# Altium PCB Q23_BRAKE_LIGHT_O1.PcbDoc
Units mm, origin at the board's own origin, x right, y up, seen from the top; angles counter-clockwise.
Board outline 130.85 x 50 mm, 2 copper layers (Top Layer, Bottom Layer); 73 components, 38 nets, 147 pads, 21 vias.
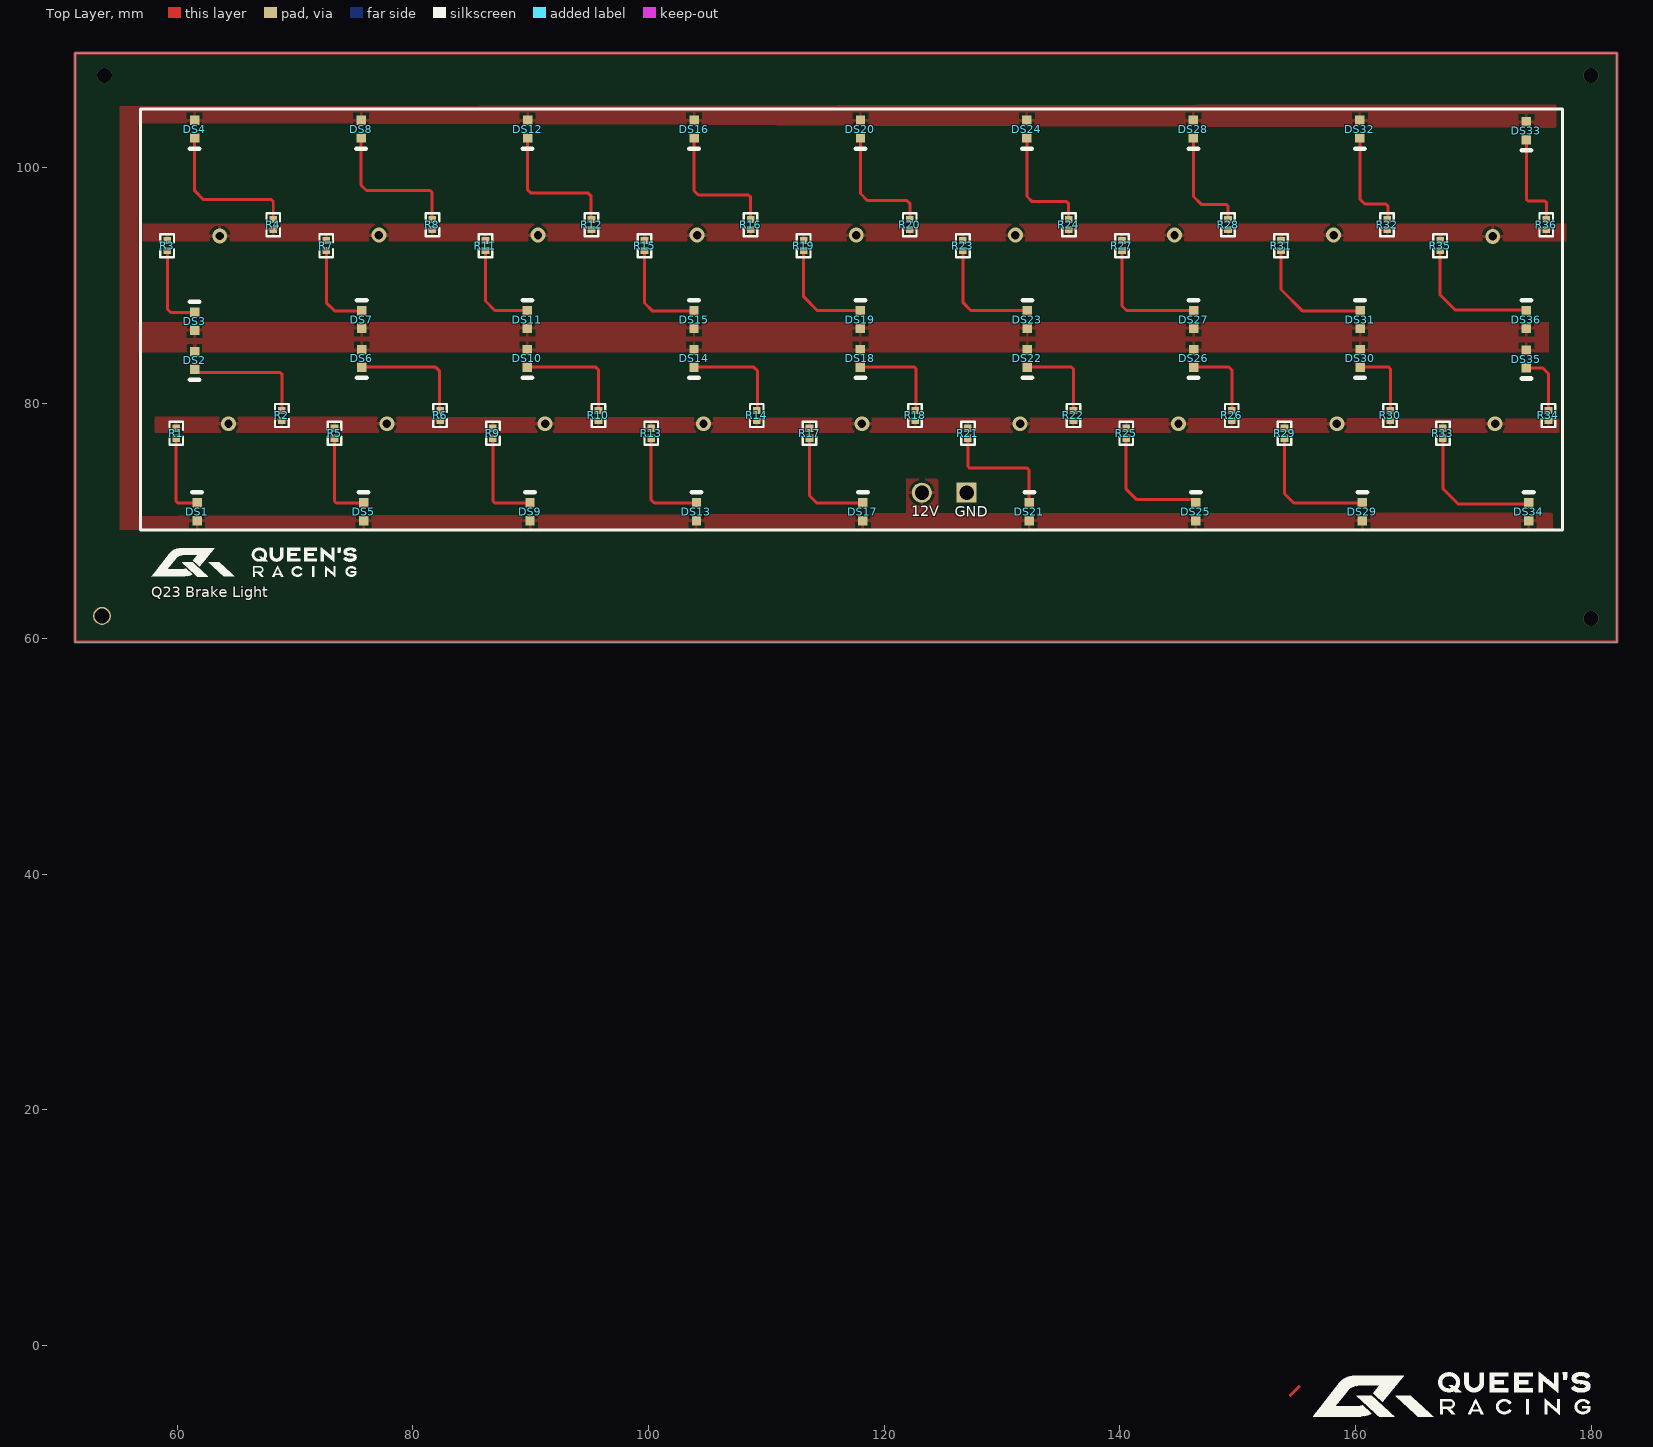
[diagram p0: Top Layer view]
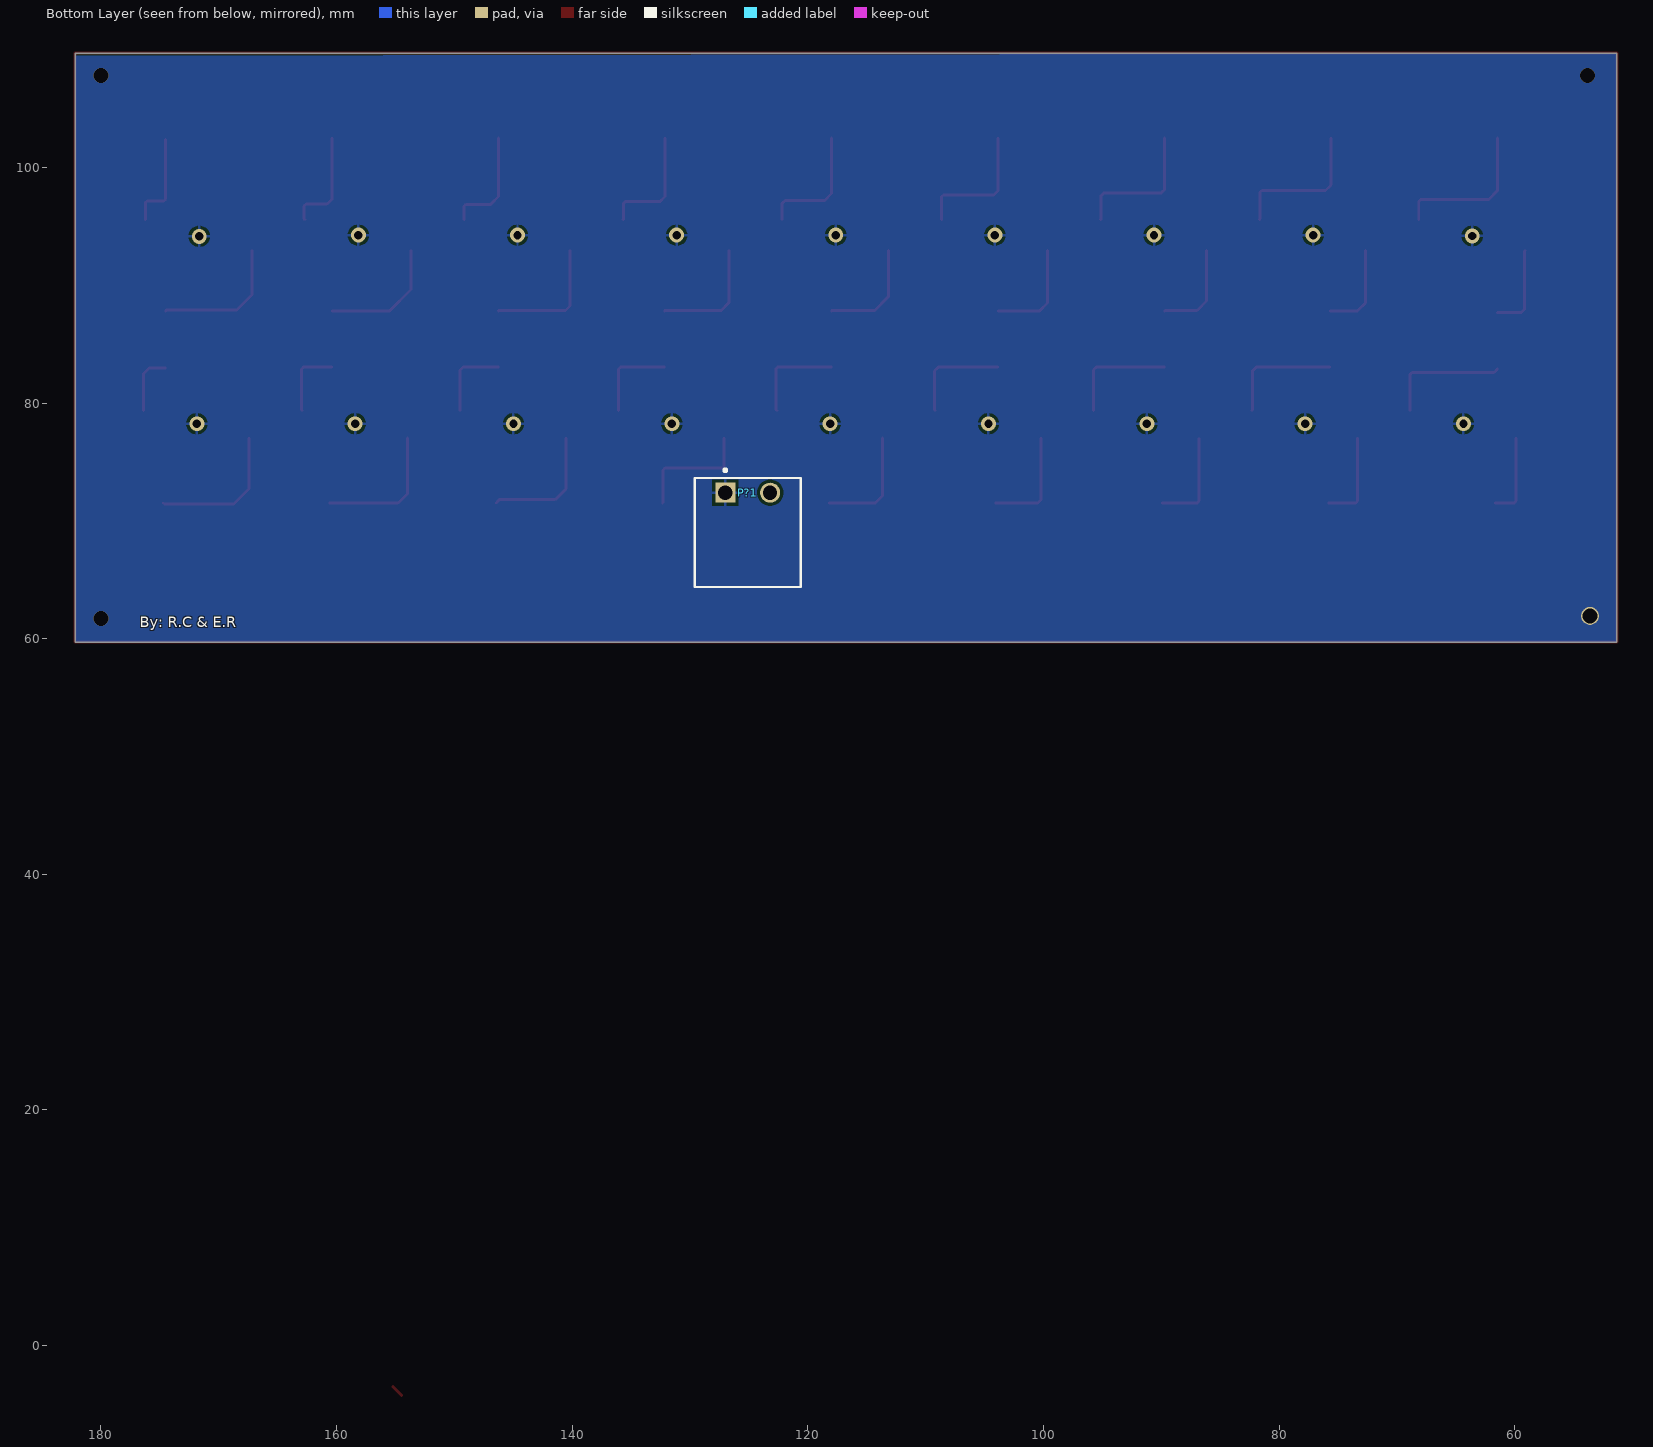
[diagram p1: Bottom Layer view, seen from below]
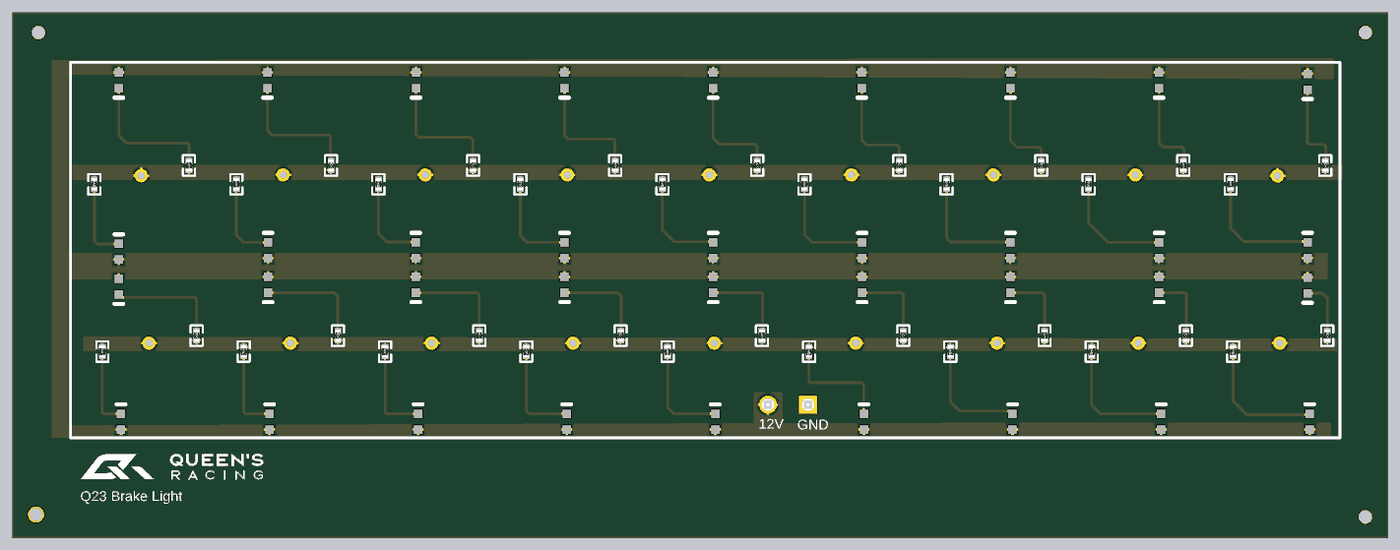
[diagram p2: 3D render of the assembled board from above, using the file's embedded part models]

## Layer stack, top to bottom
Top Solder: solder mask 0.0102, Solder Resist, Dk 3.5
Top Layer: signal copper 0.0356
Dielectric 1: dielectric 0.32, FR-4, Dk 4.8
Bottom Layer: signal copper 0.0356
Bottom Solder: solder mask 0.0102, Solder Resist, Dk 3.5

## Board outline
51.339,59.698 51.339,109.698 182.191,109.698 182.191,59.698

## Design rules (kind name [scope] priority, off if disabled: settings)
Clearance [All] p1: gap=0.254 ignorepadtopadclearanceinfootprint=FALSE except(0: Arc-Hole Track-Hole SMDPad-Hole THPad-Hole Via-Hole Fill-Hole Poly-Hole Region-Hole Text-Hole)
PolygonConnect [All] p1: connectstyle=Relief reliefconductorwidth=0.254 reliefentries=4 polygonreliefangle="90 Angle" airgapwidth=0.254
RoutingVias [All] p1: holewidth=0.711 width=1.27 viastyle="Through Hole" minholewidth=0.711 minwidth=1.27 maxholewidth=0.711 maxwidth=1.27
SolderMaskExpansion [All] p1: expansion=0.102 istentingtop=FALSE
Width [All] p1: maxlimit=0.254 minlimit=0.254 preferedwidth=0.254
30 further rules are at their usual default settings.

## Components (designator, comment, footprint, x,y, rotation, side; value= is the part's Value field where it differs from the comment)
DS1 "HSMW-C191" AVAG-HSMW-C191_V 61.693,70.771 r90 top (schematic designator DS9)
DS2 "HSMW-C191" AVAG-HSMW-C191_V 61.485,83.618 r270 top (schematic designator DS20)
DS3 "HSMW-C191" AVAG-HSMW-C191_V 61.485,86.945 r90 top (schematic designator DS17)
DS4 "HSMW-C191" AVAG-HSMW-C191_V 61.485,103.242 r270 top (schematic designator DS8)
DS5 "HSMW-C191" AVAG-HSMW-C191_V 75.82,70.771 r90 top (schematic designator DS14)
DS6 "HSMW-C191" AVAG-HSMW-C191_V 75.669,83.789 r270 top (schematic designator DS15)
DS7 "HSMW-C191" AVAG-HSMW-C191_V 75.669,87.081 r90 top (schematic designator DS4)
DS8 "HSMW-C191" AVAG-HSMW-C191_V 75.613,103.242 r270 top (schematic designator DS16)
DS9 "HSMW-C191" AVAG-HSMW-C191_V 89.948,70.771 r90 top (schematic designator DS30)
DS10 "HSMW-C191" AVAG-HSMW-C191_V 89.723,83.789 r270 top (schematic designator DS25)
DS11 "HSMW-C191" AVAG-HSMW-C191_V 89.723,87.081 r90 top (schematic designator DS18)
DS12 "HSMW-C191" AVAG-HSMW-C191_V 89.741,103.242 r270 top (schematic designator DS28)
DS13 "HSMW-C191" AVAG-HSMW-C191_V 104.076,70.771 r90 top (schematic designator DS11)
DS14 "HSMW-C191" AVAG-HSMW-C191_V 103.865,83.789 r270 top (schematic designator DS10)
DS15 "HSMW-C191" AVAG-HSMW-C191_V 103.865,87.081 r90 top (schematic designator DS6)
DS16 "HSMW-C191" AVAG-HSMW-C191_V 103.868,103.242 r270 top (schematic designator DS13)
DS17 "HSMW-C191" AVAG-HSMW-C191_V 118.203,70.771 r90 top (schematic designator DS26)
DS18 "HSMW-C191" AVAG-HSMW-C191_V 117.992,83.789 r270 top (schematic designator DS31)
DS19 "HSMW-C191" AVAG-HSMW-C191_V 117.992,87.081 r90 top (schematic designator DS5)
DS20 "HSMW-C191" AVAG-HSMW-C191_V 117.996,103.242 r270 top (schematic designator DS19)
DS21 "HSMW-C191" AVAG-HSMW-C191_V 132.331,70.771 r90 top (schematic designator DS12)
DS22 "HSMW-C191" AVAG-HSMW-C191_V 132.155,83.789 r270 top (schematic designator DS23)
DS23 "HSMW-C191" AVAG-HSMW-C191_V 132.155,87.081 r90 top (schematic designator DS29)
DS24 "HSMW-C191" AVAG-HSMW-C191_V 132.123,103.242 r270 top (schematic designator DS27)
DS25 "HSMW-C191" AVAG-HSMW-C191_V 146.458,70.771 r90 top (schematic designator DS24)
DS26 "HSMW-C191" AVAG-HSMW-C191_V 146.263,83.789 r270 top (schematic designator DS3)
DS27 "HSMW-C191" AVAG-HSMW-C191_V 146.263,87.081 r90 top (schematic designator DS22)
DS28 "HSMW-C191" AVAG-HSMW-C191_V 146.251,103.242 r270 top (schematic designator DS7)
DS29 "HSMW-C191" AVAG-HSMW-C191_V 160.586,70.771 r90 top (schematic designator DS2)
DS30 "HSMW-C191" AVAG-HSMW-C191_V 160.393,83.789 r270 top (schematic designator DS21)
DS31 "HSMW-C191" AVAG-HSMW-C191_V 160.393,87.081 r90 top (schematic designator DS1)
DS32 "HSMW-C191" AVAG-HSMW-C191_V 160.379,103.242 r270 top
DS33 "HSMW-C191" AVAG-HSMW-C191_V 174.506,103.111 r270 top (schematic designator DS36)
DS34 "HSMW-C191" AVAG-HSMW-C191_V 174.714,70.771 r90 top (schematic designator DS33)
DS35 "HSMW-C191" AVAG-HSMW-C191_V 174.506,83.73 r270 top (schematic designator DS34)
DS36 "HSMW-C191" AVAG-HSMW-C191_V 174.506,87.081 r90 top (schematic designator DS35)
P?1 "1803277" PHOE-1803277_V 125.107,72.391 r180 bottom (schematic designator P?)
R1 "22Ω ±1%" 0402_R 59.923,77.437 r270 top (schematic designator R9)
R2 "22Ω ±1%" 0402_R 68.881,78.944 r90 top (schematic designator R20)
R3 "22Ω ±1%" 0402_R 59.152,93.358 r270 top (schematic designator R17)
R4 "22Ω ±1%" 0402_R 68.156,95.138 r90 top (schematic designator R8)
R5 "22Ω ±1%" 0402_R 73.36,77.437 r270 top (schematic designator R14)
R6 "22Ω ±1%" 0402_R 82.319,78.944 r90 top (schematic designator R15)
R7 "22Ω ±1%" 0402_R 72.658,93.358 r270 top (schematic designator R4)
R8 "22Ω ±1%" 0402_R 81.661,95.138 r90 top (schematic designator R16)
R9 "22Ω ±1%" 0402_R 86.798,77.437 r270 top (schematic designator R30)
R10 "22Ω ±1%" 0402_R 95.757,78.944 r90 top (schematic designator R25)
R11 "22Ω ±1%" 0402_R 86.163,93.358 r270 top (schematic designator R18)
R12 "22Ω ±1%" 0402_R 95.166,95.138 r90 top (schematic designator R28)
R13 "22Ω ±1%" 0402_R 100.236,77.437 r270 top (schematic designator R11)
R14 "22Ω ±1%" 0402_R 109.194,78.944 r90 top (schematic designator R10)
R15 "22Ω ±1%" 0402_R 99.668,93.358 r270 top (schematic designator R6)
R16 "22Ω ±1%" 0402_R 108.671,95.138 r90 top (schematic designator R13)
R17 "22Ω ±1%" 0402_R 113.674,77.437 r270 top (schematic designator R26)
R18 "22Ω ±1%" 0402_R 122.632,78.944 r90 top (schematic designator R31)
R19 "22Ω ±1%" 0402_R 113.173,93.358 r270 top (schematic designator R5)
R20 "22Ω ±1%" 0402_R 122.177,95.138 r90 top (schematic designator R19)
R21 "22Ω ±1%" 0402_R 127.111,77.437 r270 top (schematic designator R12)
R22 "22Ω ±1%" 0402_R 136.07,78.944 r90 top (schematic designator R23)
R23 "22Ω ±1%" 0402_R 126.678,93.358 r270 top (schematic designator R29)
R24 "22Ω ±1%" 0402_R 135.682,95.138 r90 top (schematic designator R27)
R25 "22Ω ±1%" 0402_R 140.549,77.437 r270 top (schematic designator R24)
R26 "22Ω ±1%" 0402_R 149.507,78.944 r90 top (schematic designator R3)
R27 "22Ω ±1%" 0402_R 140.184,93.358 r270 top (schematic designator R22)
R28 "22Ω ±1%" 0402_R 149.187,95.138 r90 top (schematic designator R7)
R29 "22Ω ±1%" 0402_R 153.987,77.437 r270 top (schematic designator R2)
R30 "22Ω ±1%" 0402_R 162.945,78.944 r90 top (schematic designator R21)
R31 "22Ω ±1%" 0402_R 153.689,93.358 r270 top (schematic designator R1)
R32 "22Ω ±1%" 0402_R 162.692,95.138 r90 top
R33 "22Ω ±1%" 0402_R 167.424,77.437 r270 top
R34 "22Ω ±1%" 0402_R 176.383,78.944 r90 top
R35 "22Ω ±1%" 0402_R 167.194,93.358 r270 top
R36 "22Ω ±1%" 0402_R 176.198,95.138 r90 top

## Footprints (in the part's own frame and the unit in brackets; to place one, negate y for a bottom-side part, rotate by r counter-clockwise, add the part's x,y. Pads: shape width x height; smd on the part's side, far side on the other; paste and mask are expansions set on the pad)
0402_R [mm]
  rect 0.6x0.65 smd mask+0.051: 1(-0.425,0) 2(0.425,0)
  silkscreen extent -0.97,-0.58 0.97,0.58, body extent -0.57,-0.27 0.58,0.28, height 0.41
AVAG-HSMW-C191_V [mm] "SMD, 2-Leads, Body 1.6x0.8mm"
  rect 0.8x0.8 smd: 1(-0.75,0) 2(0.75,0)
  silkscreen extent 1.65,-0.4 1.65,0.4, body extent -0.8,-0.4 0.8,0.4, height 0.7
PHOE-1803277_V [mm] "CONN, Body 9.2x9.01mm, Pitch 3.81mm"
  rect 1.7x1.7 hole 1.2: 1(-1.905,0)
  round 1.7 hole 1.2: 2(1.905,0)
  silkscreen extent -4.5,-8 4.5,2.02, body extent -4.51,-8 4.5,1.29, height 7.25

## Part data
DS1 DS2 DS3 DS4 DS5 DS6 DS7 DS8 DS9 DS10 DS11 DS12 DS13 DS14 DS15 DS16 DS17 DS18 DS19 DS20 DS21 DS22 DS23 DS24 DS25 DS26 DS27 DS28 DS29 DS30 DS31 DS32 DS33 DS34 DS35 DS36: library part CMP-007-00016-2, "LED Uni-Color White, 78 mW, 20 mA, -40 to 85 degC, 2-Pin SMD, RoHS, Tape and Reel", Case/Package=0603, Colour=White, Forward Current=20mA, Forward Voltage=3.6V, Manufacturer=Avago, Max Operating Temperature=85°C, Min Operating Temperature=-40°C, Package Description="2-Pin Surface Mount Device, Body 1.6 x 0.8 mm", Package Quantity=4000, Power=78mW, Datasheet URL=http://docs.avagotech.com/docs/AV02-0186EN, Datasheet Version=May-10, Illumination Colour=White, Lens Style=Diffused, Luminous Intensity=200mcd, Manufacturer URL=http://www.avagotech.com/, Mounting Technology=SM, Nominal Vf=3.6V, Package Reference=HSMW-C191, Packaging=TapeandReel, Pins=2, RoHS Compliant=True, Viewing Angle=140degrees
P?1: library part CMP-002-00014-2, "Male Header, Pitch 3.81 mm, 1 x 2 Position, Height 7.25 mm, Tail Length 3.4 mm, RoHS, Bulk", Colour=Green, Current Rating=8A, Manufacturer="Phoenix Contact", Package Description="Male Header, Pitch 3.81 mm, 1 x 2 Position, Height 7.25 mm, Tail Length 3.4 mm", Package Quantity=50, Voltage Rating=160V, Case/Package=1803277, Connector Type=Header, Contact Plating=Tin, Datasheet URL=https://datasheet.ciiva.com/16096/1803277-16096845.pdf, Datasheet Version=Feb-14, Diameter=7.25mm, Gender=Male, Lead Pitch=0.15inch, Manufacturer URL=http://www.phoenixcontact.com/, Max Current Rating=8A, Mounting Technology=TH, Package Reference=1803277, Packaging=Bulk, Pins=2, RoHS Compliant=True, Rows=1
R1 R2 R3 R4 R5 R6 R7 R8 R9 R10 R11 R12 R13 R14 R15 R16 R17 R18 R19 R20 R21 R22 R23 R24 R25 R26 R27 R28 R29 R30 R31 R32 R33 R34 R35 R36: library part "0402 22R (22R0) 1%", "Chip resistor", Manufacturer="Uniroyal Elec", Package=0402, PartNumber=0402WGF220JTCE, Power=1/16W, Resistance=22Ω, SuppliersPartNumber=C25092, Tolerance=1%, ComponentLink1Description="Supplier link", ComponentLink1URL=http://www.szlcsc.com/product/details_25835.html, Supplier=LC

## Free pads (board coordinates)
  round 1.524 hole 1.27: 3(53.618,61.931)

## Via types
v1: diameter 1.27, hole 0.711, Top Layer to Bottom Layer, 18 vias
v2: diameter 1.27, hole 1.27, Top Layer to Bottom Layer, 3 vias

## Nets (pads, with @x,y where several pads share a name; then routed paths per layer and width w, separated by ;. In a path a pad name is that pad's centre, name@x,y a point inside that pad or via, vN(x,y) a via of type N, cw(c..) or ccw(c..) an arc to the next point about the centre after c; other vN are vias at no path point)
+12: DS1.1 DS2.1 DS3.1 DS4.1 DS5.1 DS6.1 DS7.1 DS8.1 DS9.1 DS10.1 DS11.1 DS12.1 DS13.1 DS14.1 DS15.1 DS16.1 DS17.1 DS18.1 DS19.1 DS20.1 DS21.1 DS22.1 DS23.1 DS24.1 DS25.1 DS26.1 DS27.1 DS28.1 DS29.1 DS30.1 DS31.1 DS32.1 DS33.1 DS34.1 DS35.1 DS36.1 P?1.2
GND: P?1.1 R1.1 R2.1 R3.1 R4.1 R5.1 R6.1 R7.1 R8.1 R9.1 R10.1 R11.1 R12.1 R13.1 R14.1 R15.1 R16.1 R17.1 R18.1 R19.1 R20.1 R21.1 R22.1 R23.1 R24.1 R25.1 R26.1 R27.1 R28.1 R29.1 R30.1 R31.1 R32.1 R33.1 R34.1 R35.1 R36.1
  other v1: 64.362,78.243 77.8,78.243 91.237,78.243 104.675,78.243 118.113,78.243 131.551,78.243 144.988,78.243 158.426,78.243 171.864,78.243 171.656,94.144 63.614,94.178 77.119,94.246 90.624,94.246 104.13,94.246 117.635,94.246 131.14,94.246 144.645,94.246 158.151,94.246
NetDS1_2: DS31.2 R31.2 | length 10.8
  Top Layer w0.254: R31.2 153.689,89.632 155.49,87.831 DS31.2
NetDS2_2: DS29.2 R29.2 | length 11.6
  Top Layer w0.254: R29.2 153.987,72.307 154.773,71.521 DS29.2
NetDS3_2: DS26.2 R26.2 | length 6.8
  Top Layer w0.254: DS26.2 149.265,83.039 149.507,82.797 R26.2
NetDS4_2: DS7.2 R7.2 | length 7.7
  Top Layer w0.254: R7.2 72.658,88.516 73.348,87.826 75.664,87.826 DS7.2
NetDS5_2: DS19.2 R19.2 | length 9.2
  Top Layer w0.254: R19.2 113.173,89.014 114.313,87.874 117.949,87.874 DS19.2
NetDS6_2: DS15.2 R15.2 | length 8.9
  Top Layer w0.254: R15.2 99.668,88.482 100.319,87.831 DS15.2
NetDS7_2: DS28.2 R28.2 | length 9.4
  Top Layer w0.254: DS28.2 146.251,97.522 146.912,96.861 149.03,96.861 149.178,96.712 149.178,95.572 R28.2
NetDS8_2: DS4.2 R4.2 | length 13.1
  Top Layer w0.254: DS4.2 61.485,98.011 62.234,97.263 68.007,97.263 68.156,97.114 R4.2
NetDS9_2: DS1.2 R1.2 | length 7.2
  Top Layer w0.254: R1.2@59.898,77.012 59.898,71.67 60.046,71.521 DS1.2
NetDS10_2: DS14.2 R14.2 | length 8.9
  Top Layer w0.254: DS14.2 108.946,83.039 109.253,82.732 109.253,79.428 R14.2
NetDS11_2: DS13.2 R13.2 | length 9.2
  Top Layer w0.254: R13.2 100.236,71.777 100.492,71.521 DS13.2
NetDS12_2: DS21.2 R21.2 | length 10.5
  Top Layer w0.254: R21.2 127.111,74.619 127.26,74.471 132.144,74.471 132.293,74.322 132.293,71.559 DS21.2
NetDS13_2: DS16.2 R16.2 | length 11.4
  Top Layer w0.254: DS16.2 103.868,98.025 104.229,97.664 108.498,97.664 108.646,97.516 108.646,95.588 R16.2
NetDS14_2: DS5.2 R5.2 | length 7.9
  Top Layer w0.254: R5.2@73.36,77.011 73.36,71.67 73.508,71.521 DS5.2
NetDS15_2: DS6.2 R6.2 | length 10.1
  Top Layer w0.254: DS6.2 81.945,83.039 82.286,82.698 82.286,79.402 R6.2
NetDS16_2: DS8.2 R8.2 | length 12.6
  Top Layer w0.254: DS8.2 75.613,98.484 76.06,98.037 81.476,98.037 81.625,97.888 81.625,95.599 R8.2
NetDS17_2: DS3.2 R3.2 | length 7.4
  Top Layer w0.254: R3.2 59.178,92.907 59.178,87.959 59.468,87.669 61.459,87.669 DS3.2
NetDS18_2: DS11.2 R11.2 | length 8.2
  Top Layer w0.254: R11.2 86.163,88.662 86.963,87.862 89.692,87.862 DS11.2
NetDS19_2: DS20.2 R20.2 | length 10.6
  Top Layer w0.254: DS20.2 117.996,97.781 118.6,97.177 121.951,97.177 122.177,96.951 R20.2
NetDS20_2: DS2.2 R2.2 | length 10.7
  Top Layer w0.254: DS2.2 61.758,82.595 68.739,82.595 68.888,82.446 68.888,79.376 R2.2
NetDS21_2: DS30.2 R30.2 | length 6.2
  Top Layer w0.254: DS30.2 162.833,83.039 162.982,82.89 162.982,79.406 R30.2
NetDS22_2: DS27.2 R27.2 | length 10.9
  Top Layer w0.254: R27.2 140.184,88.242 140.576,87.85 146.244,87.85 DS27.2
NetDS23_2: DS22.2 R22.2 | length 7.5
  Top Layer w0.254: DS22.2 135.912,83.039 136.07,82.881 R22.2
NetDS24_2: DS25.2 R25.2 | length 10.7
  Top Layer w0.254: R25.2 140.549,72.691 141.446,71.794 146.185,71.794 DS25.2
NetDS25_2: DS10.2 R10.2 | length 9.6
  Top Layer w0.254: DS10.2 95.536,83.039 95.757,82.818 R10.2
NetDS26_2: DS17.2 R17.2 | length 9.7
  Top Layer w0.254: R17.2 113.674,72.12 114.278,71.516 116.102,71.516 116.107,71.521 DS17.2
NetDS27_2: DS24.2 R24.2 | length 10.1
  Top Layer w0.254: DS24.2 132.123,97.537 132.57,97.091 135.496,97.091 135.668,96.919 135.668,95.577 R24.2
NetDS28_2: DS12.2 R12.2 | length 12
  Top Layer w0.254: DS12.2 89.741,98.097 90.001,97.836 94.849,97.836 95.136,97.55 95.136,95.593 R12.2
NetDS29_2: DS23.2 R23.2 | length 10.2
  Top Layer w0.254: R23.2 126.678,88.544 127.384,87.838 132.148,87.838 DS23.2
NetDS30_2: DS9.2 R9.2 | length 8.6
  Top Layer w0.254: R9.2@86.8,77.01 86.8,71.67 86.948,71.521 DS9.2
NetDS31_2: DS18.2 R18.2 | length 8.3
  Top Layer w0.254: DS18.2 122.57,83.039 122.719,82.89 122.719,79.456 R18.2
NetDS32_2: DS32.2 R32.2 | length 9
  Top Layer w0.254: DS32.2 160.379,97.307 160.796,96.89 162.598,96.89 162.746,96.741 162.746,95.617 R32.2
NetDS33_2: DS34.2 R33.2 | length 12.2
  Top Layer w0.254: R33.2 167.424,72.722 168.726,71.421 174.614,71.421 DS34.2
NetDS34_2: DS35.2 R34.2 | length 5.2
  Top Layer w0.254: DS35.2 175.895,82.98 176.381,82.494 176.381,79.371 R34.2
NetDS35_2: DS36.2 R35.2 | length 11.6
  Top Layer w0.254: R35.2 167.194,89.174 168.458,87.91 174.427,87.91 DS36.2
NetDS36_2: DS33.2 R36.2 | length 8.4
  Top Layer w0.254: DS33.2 174.506,97.297 174.655,97.148 176.079,97.148 176.228,96.999 176.228,95.593 R36.2
copper on no net: | length 362.8
  Top Layer w0.254: 154.47,-4.224 155.232,-3.462 ; 51.339,59.698 182.191,59.698 182.191,109.698 51.339,109.698 51.339,59.698
  other v2: 180.006,61.703 53.846,107.787 180.006,107.787

## Polygon pours and split planes (outlines as drawn)
GND on Top Layer "GND_L01_P001" (solid, pour order 1): 57.074,95.207 57.074,93.735 177.891,93.735 177.891,94.73 177.891,95.207
GND on Top Layer "GND_L01_P003" (solid, pour order 3): 177.31,78.666 177.31,77.482 58.125,77.482 58.092,77.514 58.092,77.774 58.092,78.861
+12 on Top Layer "+12_L01_P005" (solid, pour order 5): 56.703,86.841 176.417,86.841 176.417,84.317 56.703,84.317 56.703,70.383 59.696,70.434 59.868,70.383 60.046,70.434 121.867,70.635 121.867,73.591 124.591,73.591 124.607,73.574 124.607,70.638 176.62,70.704 176.768,70.556 176.768,69.236 55.115,69.236 55.115,105.174 177.043,105.364 177.043,103.342 56.703,103.766 56.703,102.323
GND on Bottom Layer "GND_L02_P000" (solid, pour order 0): 51.339,109.698 51.339,59.698 182.191,59.698 182.191,109.453

## Silkscreen, mask and mechanical layers (free items; w line width, h text height)
Top Overlay:
  drawing of 49 lines, arcs and shapes, not listed
  text "12V" at 122.318,70.097 h1.52
  text "GND" at 125.987,70.031 h1.52
  text "Q23 Brake Light" at 57.816,63.219 h1.52
  text "BSPD TEST BOARD" at 156.668,-8.669 h1.52
  text "Q23" at 156.629,-11.463 h1.52
Bottom Overlay:
  text "By: R.C & E.R" at 176.718,60.673 h1.52